# EAGLE board Gig_tps61042 (EAGLE 6.5.0)
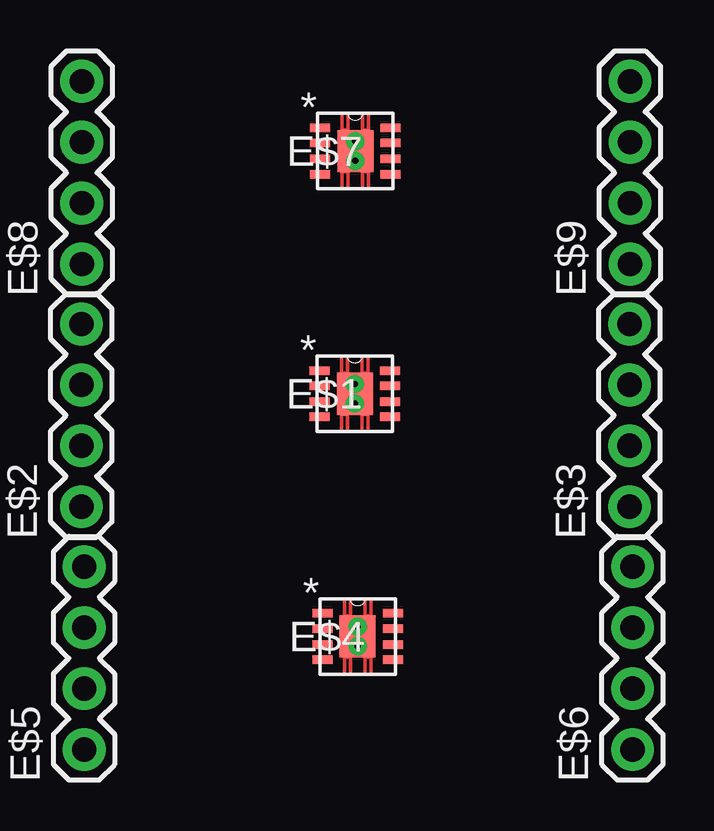
[diagram p0: board, top side]
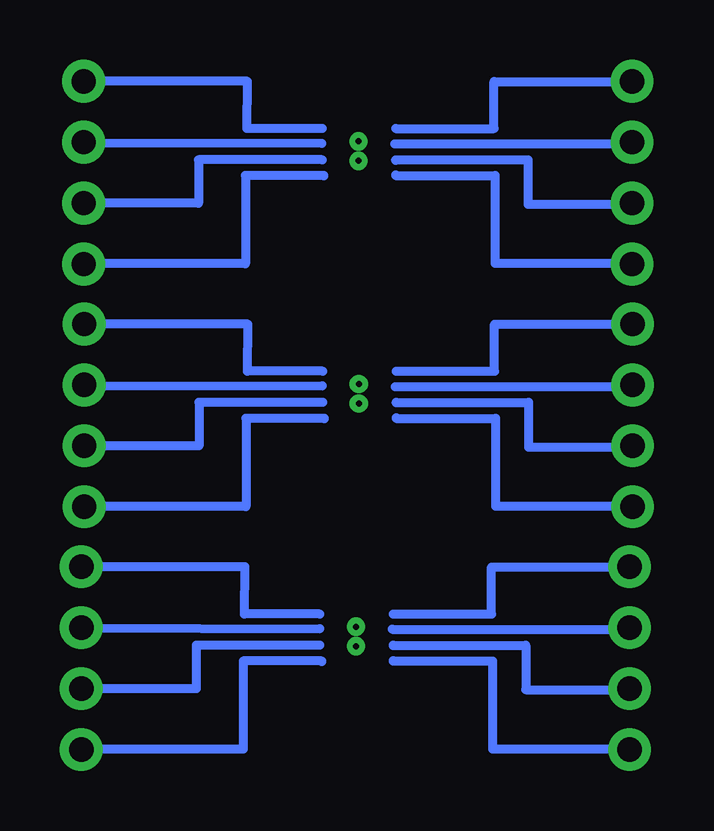
[diagram p1: board, bottom side, seen from below]

No outline drawn. Coordinates in mm, seen from the top.
Copper layers (1*16): Top 0.035mm / dielectric 1.5mm / Bottom 0.035mm
Design rules "default": minimum track width 10mil, minimum drill 24mil, track to track 8mil, track to pad 8mil, pad to pad 8mil, via to via 8mil, smd to smd 8mil, copper to edge 40mil, drill to drill 8mil, minimum pad ring 10mil, minimum via ring 8mil, stop-mask expansion 4mil, vias tented up to drill 0mil, thermal gap 10mil

## Footprints (pad centres in the part's own frame; a part is rotated, then mirrored left to right if it is on the bottom)
DRB8_1P75X1P5 = smd 0.838 x 0.356: 1 -1.473,0.965; 2 -1.473,0.33; 3 -1.473,-0.33; 4 -1.473,-0.965; 5 1.473,-0.965; 6 1.473,-0.33; 7 1.473,0.33; 8 1.473,0.965 | smd 1.499 x 1.753: 9 0,0 | drill 0.254: V 0,-0.406; V_2 0,0.406
1X04-BIG = drill 1.016 pad 1.778: 1 0,0; 2 2.54,0; 3 5.08,0; 4 7.62,0

## Placement (x,y rotation side)
E$1  [DRB8_1P75X1P5]  60.94,63.13 0 top
E$2  [1X04-BIG]  49.53,58.42 90 top
E$3  [1X04-BIG]  72.39,58.42 90 top
E$4  [DRB8_1P75X1P5]  61.06,53.01 0 top
E$5  [1X04-BIG]  49.65,48.3 90 top
E$6  [1X04-BIG]  72.51,48.3 90 top
E$7  [DRB8_1P75X1P5]  60.96,73.25 0 top
E$8  [1X04-BIG]  49.55,68.54 90 top
E$9  [1X04-BIG]  72.41,68.54 90 top

## Library data of the parts
E$1 E$4 E$7 = tps61042
E$2 E$3 E$5 E$6 E$8 E$9 = adafruit

## Tracks (layer width: path | path; a pad name or v marks a point on that pad's centre or on a via)
S$1
  Bottom 0.381: 62.45,64.07 65.59,64.07 | 65.59,64.07 65.59,64.44 | 65.59,64.07 65.56,66.03 72.36,66.03
S$2
  Bottom 0.381: 72.41,63.51 arc-90 72.38,63.48 62.45,63.46
S$3
  Bottom 0.381: 62.45,62.77 67.6,62.77 67.6,60.96 72.4,60.96
S$4
  Bottom 0.381: 62.37,62.09 62.37,62.11 65.64,62.11 65.64,58.43 72.4,58.43
S$5
  Bottom 0.381: 59.43,63.43 49.47,63.43
S$6
  Bottom 0.381: 59.38,64.07 55.28,64.07 55.28,66.03 49.45,66.03 49.45,66.18 49.5,66.18
S$7
  Bottom 0.381: 59.38,62.75 59.38,62.77 53.86,62.77 53.86,60.91 49.45,60.91
S$8
  Bottom 0.381: 59.38,62.13 59.38,62.11 55.24,62.11 55.24,58.45 49.45,58.45
S$9
  Bottom 0.381: 62.57,53.95 65.71,53.95 | 65.71,53.95 65.71,54.32 | 65.71,53.95 65.68,55.91 72.48,55.91
S$10
  Bottom 0.381: 72.53,53.39 arc-90 72.5,53.36 62.57,53.34
S$11
  Bottom 0.381: 62.57,52.65 67.72,52.65 67.72,50.84 72.52,50.84
S$12
  Bottom 0.381: 62.49,51.97 62.49,51.99 65.76,51.99 65.76,48.31 72.52,48.31
S$13
  Bottom 0.381: 59.55,53.31 49.59,53.31
S$14
  Bottom 0.381: 59.5,53.95 55.4,53.95 55.4,55.91 49.57,55.91 49.57,56.06 49.62,56.06
S$15
  Bottom 0.381: 59.5,52.63 59.5,52.65 53.98,52.65 53.98,50.79 49.57,50.79
S$16
  Bottom 0.381: 59.5,52.01 59.5,51.99 55.36,51.99 55.36,48.33 49.57,48.33
S$17
  Bottom 0.381: 62.47,74.19 65.61,74.19 | 65.61,74.19 65.61,74.56 | 65.61,74.19 65.58,76.16 72.38,76.16
S$18
  Bottom 0.381: 72.42,73.63 arc-90 72.4,73.6 62.47,73.58
S$19
  Bottom 0.381: 62.47,72.89 67.62,72.89 67.62,71.08 72.42,71.08
S$20
  Bottom 0.381: 62.39,72.21 62.39,72.23 65.66,72.23 65.66,68.55 72.42,68.55
S$21
  Bottom 0.381: 59.45,73.55 49.49,73.55
S$22
  Bottom 0.381: 59.4,74.19 55.3,74.19 55.3,76.15 49.47,76.15 49.47,76.3 49.52,76.3
S$23
  Bottom 0.381: 59.4,72.87 59.4,72.89 53.88,72.89 53.88,71.03 49.47,71.03
S$24
  Bottom 0.381: 59.4,72.25 59.4,72.23 55.26,72.23 55.26,68.57 49.47,68.57